# Altium PCB PCB2.PcbDoc (part 2 of 2)
Units mil, origin at the board's own origin, x right, y up, seen from the top; angles counter-clockwise.
Board outline 3629.25 x 3621.67 mil, 2 copper layers (Top Layer, Bottom Layer); 84 components, 57 nets, 320 pads, 58 vias.
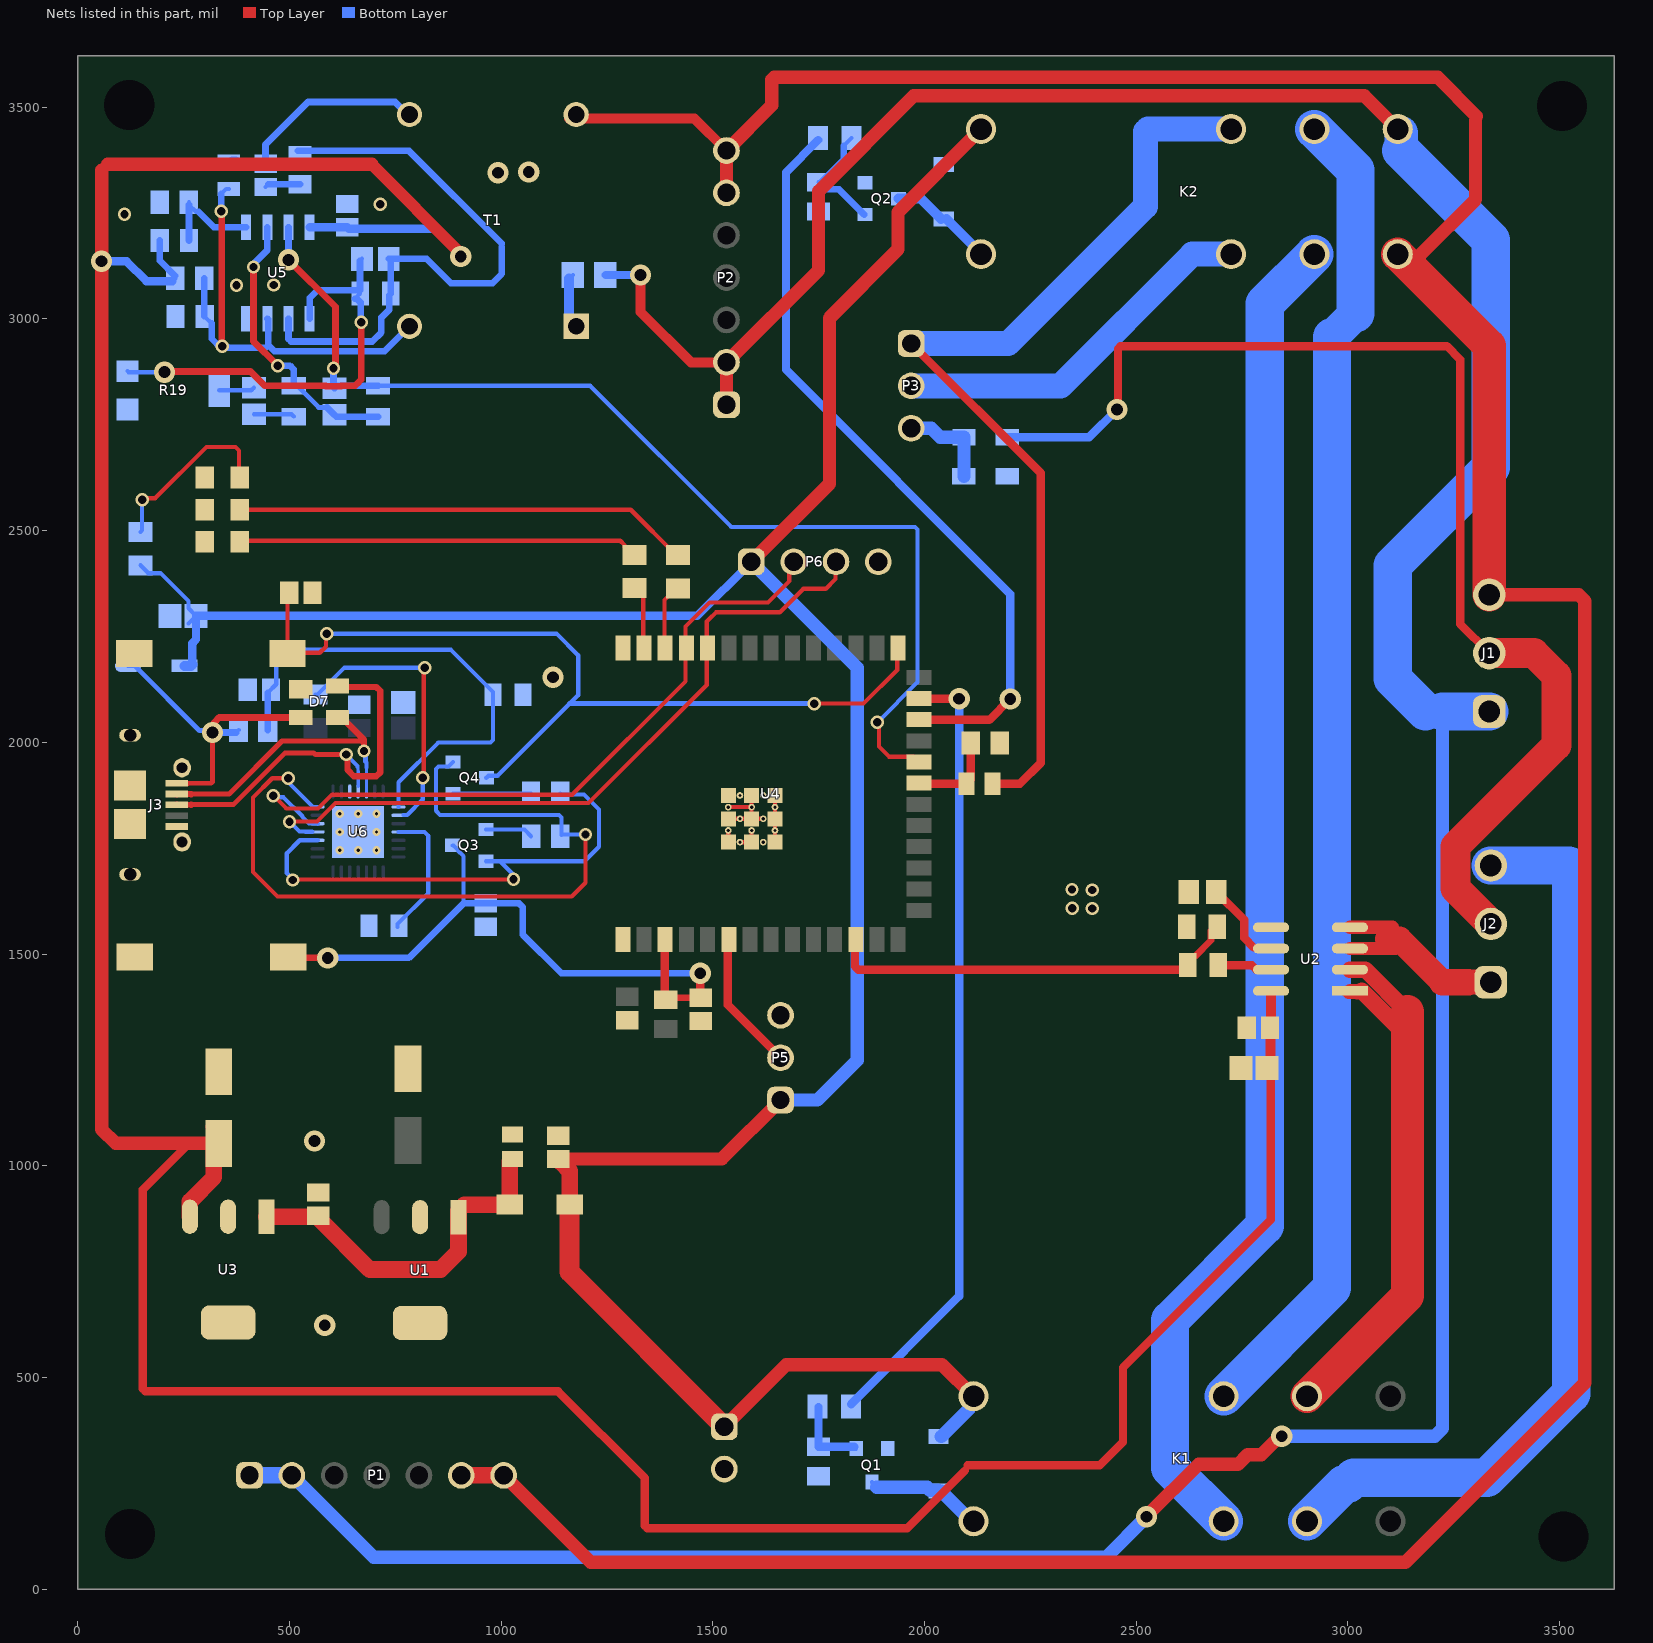
[diagram p2: the nets of this part, all layers, seen from the top]

## Via types
v1: diameter 31.5, hole 19.68, Top Layer to Bottom Layer, 28 vias
v2: diameter 50, hole 28, Top Layer to Bottom Layer, 21 vias
v3: diameter 19.68, hole 7.87, Top Layer to Bottom Layer, 9 vias

## Nets (pads, with @x,y where several pads share a name; then routed paths per layer and width w, separated by ;. In a path a pad name is that pad's centre, name@x,y a point inside that pad or via, vN(x,y) a via of type N, cw(c..) or ccw(c..) an arc to the next point about the centre after c; other vN are vias at no path point) (continued)
+3V3B: C1.1 C2.2 C8.2 C13.1 R15.2 R23.2 U2.8 U3.3 U5.8 | length 8912.1
  Top Layer w10: 154.26,473.14 160.12,467.28 ; C8.2@333.5,1052.81 333.5,1079.19 C8.2@340.53,1086.23 ; 1134.87,467.28 1134.96,467.38 ; 1339.7,150.18 1345.55,144.32 ; 2095.78,280.46 2095.78,287.16 2101.63,293.02 ; C2.2@2812.63,1318.2 C2.2@2817.4,1313.44
  Top Layer w19.68: 154.26,473.14 154.26,943.98 261.93,1051.64 ; 160.12,467.28 1134.87,467.28 ; 1134.96,467.38 1339.7,262.64 1339.7,150.18 ; 1345.55,144.32 1959.64,144.32 2095.78,280.46 ; 2101.63,293.02 2414.13,293.02 2468.58,347.48 2468.58,523.67 2817.4,872.49 C1.1@2817.4,1222.62
  Top Layer w23.62: 57.23,3350.8 71.07,3364.64 ; v2(905.07,3146.98) v2@905.07,3153.94 ; C2.2@2815.67,1325.72 C2.2@2820.37,1330.42 ; C1.1@2817.4,1222.62 C2.2@2817.4,1313.44 ; C2.2@2818.33,1329.82 U2.8@2818.33,1412.96
  Top Layer w27.56: 694.37,3364.64 v2@905.07,3153.94
  Top Layer w31.5: 57.23,3350.8 57.23,3136.66 v2(56.38,3135.81) 57.23,3134.96 57.23,1329.09 57.23,1085.51 89.93,1052.81 C8.2@333.5,1052.81 333.5,1076.44 C8.2@317.75,1092.18 ; 71.07,3364.64 694.37,3364.64
  Top Layer w39.37: U3.3@265.17,879.76 265.17,916.04 322.03,972.9 322.03,1041.34 C8.2@333.5,1052.81
  Bottom Layer w10: R15.2@224.21,3089.03 R15.2@230.53,3095.35 R15.2@230.53,3101.25 ; C13.1@636.83,3216.23 C13.1@637.01,3216.06 C13.1@640.55,3212.51
  Bottom Layer w15.75: R23.2@194.24,3184.9 194.24,3137.55 R15.2@230.53,3101.25
  Bottom Layer w19.68: v2(56.38,3135.81) 115.88,3135.81 162.66,3089.03 R15.2@224.21,3089.03 ; U5.8@548.22,3216.23 C13.1@636.83,3216.23 ; C13.1@640.55,3212.51 846.5,3212.51 905.07,3153.94 v2(905.07,3146.98)
+5V: C3.2 C17.1 D1.1 D2.1 D6.1 FB2.1 K1.8 K2.8 P4.1 P5.1 P6.1 R18.1 | length 6771.8
  Top Layer w10: C3.2@1137.44,1007.39 C3.2@1142.36,1007.39
  Top Layer w31.5: C3.2@1135.25,1016.12 1521.13,1016.12 P5.1@1660.14,1155.13 ; P4.1@1527.43,383.9 1673.82,530.29 2041.39,530.29 K1.8@2115.86,455.82 ; P6.1@1591.01,2426.17 1775.6,2610.76 1775.6,3001.91 1937.42,3163.73 1937.42,3251.95 K2.8@2133.3,3447.83
  Top Layer w39.37: C3.2@1142.36,1007.39 1162.05,987.7 FB2.1@1162.05,908.06
  Top Layer w47.24: FB2.1@1162.05,908.06 1162.05,749.28 P4.1@1527.43,383.9
  Bottom Layer w10: R18.1@148.5,2417.97 167.12,2399.35 195.85,2399.35 261.89,2333.31 261.89,2316.46 C17.1@279.92,2298.43 C17.1@261.89,2280.39 ; D1.1@2033.18,360.55 D1.1@2039.29,360.55 ; D2.1@2045.62,3364.57 D2.1@2051.73,3364.57 ; K1.8@2104.19,425.46 2104.19,444.15 K1.8@2115.86,455.82 ; K2.8@2133.3,3446.14 K2.8@2133.3,3447.83
  Bottom Layer w19.68: D6.1@271.05,2183.17 271.05,2233.84 279.92,2242.71 C17.1@279.92,2298.43 1463.26,2298.43 P6.1@1591.01,2426.17
  Bottom Layer w23.62: D6.1@253.01,2180.36 268.24,2180.36 D6.1@271.05,2183.17 ; D2.1@2051.73,3364.57 K2.8@2133.3,3446.14
  Bottom Layer w31.5: P6.1@1591.01,2426.17 1841.16,2176.02 1841.16,1249.23 1747.07,1155.13 P5.1@1660.14,1155.13 ; D1.1@2039.29,360.55 K1.8@2104.19,425.46
+5V_B: C4.1 C7.2 FB2.2 U1.1 U3.1 | length 857
  Top Layer w10: C7.2@560.95,888.88 C7.2@568.17,881.66 C7.2@573.09,881.66 ; U1.1@899.42,894.12 U1.1@913.36,908.06 ; C4.1@1020.32,1010.05 C4.1@1026.77,1016.5
  Top Layer w39.37: U3.1@446.27,879.76 C7.2@560.33,879.76 ; C7.2@572.47,872.54 689.87,755.14 857.46,755.14 899.42,797.1 U1.1@899.42,894.12 ; U1.1@913.36,908.06 FB2.2@1020.32,908.06 C4.1@1020.32,1010.05
"AC IN Negative": J1.3 K2.4 P1.6 P1.7 P2.6 P2.7 T1.2 | length 8739.1
  Top Layer w10: 1639.24,3564.2 1645.1,3570.05 ; K2.4@3117.55,3152.56 3172.2,3152.56 ; 3301.17,3468.24 3303.21,3470.28 3303.21,3478.57
  Top Layer w23.62: T1.2@1160.85,3473.16 1456.51,3473.16 P2.7@1532.37,3397.3
  Top Layer w31.5: P1.7@1006.2,268.87 1211.57,63.51 3135.78,63.51 3559.38,487.12 3559.38,2333.75 3544.83,2348.3 J1.3@3333.73,2348.3 ; P2.6@1532.37,3297.3 P2.7@1532.37,3397.3 1639.24,3504.17 1639.24,3564.2 ; 1645.1,3570.05 3211.72,3570.05 3303.21,3478.57 ; 3172.2,3152.56 3301.17,3281.52 3301.17,3468.24
  Top Layer w39.37: P1.6@906.2,268.87 P1.7@1006.2,268.87
  Top Layer w78.74: K2.4@3117.55,3152.56 3333.73,2936.38 J1.3@3333.73,2348.3
"AC IN Positive": J1.1 K2.5 P1.1 P1.2 P2.1 P2.2 R12.1 | length 8999.5
  Top Layer w23.62: v2@1329.44,3100.24 1329.44,3016.36 1448.49,2897.3 P2.2@1532.37,2897.3
  Top Layer w31.5: P2.1@1532.37,2797.3 P2.2@1532.37,2897.3 1749.87,3114.8 1749.87,3301.57 1974.82,3526.51 3038.87,3526.51 K2.5@3117.55,3447.83 ; v2@2523.94,171.97 2647.57,295.6 2740.37,295.6 2762.66,317.9 2795.34,317.9 2838.72,361.28 v2(2843.72,361.28)
  Bottom Layer w10: R12.1@1246.69,3103.66 R12.1@1247.09,3103.27 ; v2@1329.44,3100.24 v2(1329.44,3103.27) ; P2.1@1512.51,2817.16 P2.1@1532.37,2797.3 ; K2.5@3117.55,3447.83 K2.5@3125.7,3439.68
  Bottom Layer w19.68: R12.1@1247.09,3103.27 v2(1329.44,3103.27)
  Bottom Layer w31.5: P1.2@506.2,268.87 699.22,75.85 2429.24,75.85 2523.94,170.56 v2(2523.94,171.29) v2@2523.94,171.97 ; v2(2843.72,361.28) 3204.82,361.28 3223.27,379.73 3223.27,2072.7
  Bottom Layer w39.37: P1.1@406.2,268.87 P1.2@506.2,268.87
  Bottom Layer w78.74: 3125.7,3397.33 K2.5@3125.7,3439.68 ; 3183.11,2072.7 3223.27,2072.7
  Bottom Layer w90.55: 3125.7,3397.33 3337.08,3185.95 3337.08,2649.11 3105.35,2417.38 3105.35,2150.46 3183.11,2072.7 ; 3223.27,2072.7 J1.1@3333.73,2072.7
AC_GND: FB3.1 J1.2 J2.2 | length 2861.6
  Top Layer w10: 2456.75,2929.57 2462.61,2935.43
  Top Layer w19.68: v2@2456.75,2799.67 2456.75,2929.57 ; 2462.61,2935.43 3233.28,2935.43 3264.83,2903.88 3264.83,2279.41 J1.2@3333.73,2210.5
  Top Layer w70.87: J1.2@3333.73,2210.5 3439.31,2210.5 3492.15,2157.66 3492.15,1992.54 3253.64,1754.02 3253.64,1655 J2.2@3337.46,1571.18
  Bottom Layer w19.68: FB3.1@2195.49,2720.46 2388.99,2720.46 v2(2454.3,2785.77)
CHIP_EN: C10.2 C20.1 Q3.3 R9.2 SW1.2 U4.3 | length 1572.2
  Top Layer w10: SW1.2@497.27,1493.11 SW1.2@499.48,1490.89 ; U4.3@1385.74,1533.47 U4.3@1386.59,1532.62 ; R9.2@1388.68,1391.87 R9.2@1394.88,1398.07
  Top Layer w15.75: SW1.2@499.48,1490.89 v2(590.99,1490.89) ; R9.2@1392.8,1396.93 C10.2@1471.08,1396.93
  Top Layer w19.68: R9.2@1386.59,1390.72 U4.3@1386.59,1532.62 ; v2(1470.36,1454.55) 1470.72,1454.19 1470.72,1397.29 C10.2@1471.08,1396.93
  Bottom Layer w10: Q3.3@885.77,1756.54 887.74,1756.54 898.49,1745.79 898.49,1743.82 911.21,1731.1 911.21,1619.63
  Bottom Layer w15.75: v2(590.99,1490.89) 782.48,1490.89 911.21,1619.63 938.09,1619.63 959.32,1619.63 C20.1@965.84,1619.63 ; C20.1@964.24,1619.63 1042.46,1619.63 1051.69,1610.41 1051.69,1545.29 1142.43,1454.55 v2(1470.36,1454.55)
CUTOFF_POSITIVE: K1.6 U2.1 U2.2 | length 1402.5
  Top Layer w31.5: U2.1@3032.77,1412.96 U2.1@3004.63,1412.96 3001.43,1409.76 U2.1@3035.5,1407.05
  Top Layer w39.37: U2.2@3004.63,1462.96 3041.05,1462.96 3140.65,1363.35 ; U2.1@3032.77,1412.96 3140.65,1305.07
  Top Layer w78.74: K1.6@2903.26,455.82 3140.65,693.21 3140.65,1305.07 3140.65,1363.35
CUTOFF_RELAY: R5.1 U4.25 | length 1876.7
  Top Layer w10: U4.25@1984.95,2102.96 U4.25@1986.14,2101.77 ; v2(2081.85,2102.96) v2@2082.85,2103.97
  Top Layer w19.68: U4.25@1984.95,2102.96 v2(2081.85,2102.96)
  Bottom Layer w10: R5.1@1826.64,431.94 R5.1@1826.64,436.87
  Bottom Layer w19.68: R5.1@1826.64,436.87 2081.85,692.08 v2(2081.85,2102.96)
DTR: Q4.2 R24.2 U6.28 | length 1862.9
  Top Layer w10: v1(497.64,1914.95) 459.83,1914.95 414.37,1869.49 414.37,1693.74 471.96,1636.14 1167.02,1636.14 1199.32,1668.44 v1(1199.32,1782.09)
  Bottom Layer w10: v1(497.64,1914.95) 501.76,1910.84 501.76,1901.87 556.36,1847.27 U6.28@567.02,1847.27 ; Q4.2@886.42,1953.39 875.67,1942.64 852.4,1942.64 846.54,1936.78 846.54,1838.17 856.19,1828.52 1136.97,1828.52 1142.82,1822.67 1142.82,1781.13 1143.78,1782.09 v1(1199.32,1782.09)
GND: C1.2 C2.1 C3.1 C4.2 C5.1 C6.2 C7.1 C8.1 C10.1 C12.1 C13.2 C16.2 C17.2 C18.2 C19.2 C20.2 C21.1 D3.1 D4.1 D5.1 D7.1 FB1.1 J3.5 J3.Shell P4.2 P5.3 P6.4 Q1.2 Q2.2 R3.2 R4.1 R7.1 R8.1 R19.3 R20.2 R22.2 R26.2 R29.1 SW1.1 SW2.1 U1.2 U1.4 U2.5 U3.2 U3.4 U4.1 U4.40 U4.41_1 U4.41_2 U4.41_3 U4.41_4 U4.41_5 U4.41_6 U4.41_7 U4.41_8 U4.41_9 U4.41_10 U4.41_11 U4.41_12 U4.41_13 U4.41_14 U4.41_15 U4.41_16 U4.41_17 U4.41_18 U4.41_19 U4.41_20 U4.41_21 U5.4 U6.3 U6.29 | length 385.8
  Top Layer w10: U4.41_1@1536.6,1764.2 U4.41_10@1536.6,1791.76 ; U4.41_2@1536.6,1819.32 U4.41_13@1564.16,1819.32 U4.41_5@1591.72,1819.32 ; U4.41_11@1536.6,1846.88 U4.41_16@1591.72,1846.88 ; U4.41_12@1564.16,1764.2 U4.41_4@1591.72,1764.2 U4.41_15@1591.72,1791.76 ; U4.41_6@1591.72,1874.43 U4.41_16@1591.72,1846.88 ; U4.41_18@1619.28,1819.32 U4.41_5@1591.72,1819.32 ; U4.41_7@1646.84,1764.2 U4.41_20@1646.84,1791.76 U4.41_8@1646.84,1819.32 U4.41_21@1646.84,1846.88 U4.41_9@1646.84,1874.43 ; U4.41_5@1591.72,1819.32 U4.41_16@1591.72,1846.88
  other v1: 2348.94,1607.76 2396.39,1607.52 2396.39,1651.03 2348.44,1652.26 375.5,3079.07 463.44,3079.69 111.11,3246.8 715.16,3270.28
  other v2: 583.65,623.42 559.57,1058.57 1122.97,2153.54 993.01,3344.76 1065.55,3346.49
  other v3: 619.19,1744.91 662.5,1744.91 705.8,1744.91 619.19,1788.21 662.5,1788.21 705.8,1788.21 619.19,1831.52 662.5,1831.52 705.8,1831.52
GPIO_0: C18.1 Q4.3 SW2.2 U4.27 | length 2126.4
  Top Layer w10: C18.1@497.07,2341.79 495.71,2340.44 SW2.2@495.71,2209.74 497.28,2211.3 572.11,2211.3 586.54,2225.74 586.54,2254.31 v1(588.72,2256.49) ; v1(1739.87,2091.28) 1856.05,2091.28 1935.74,2170.97 U4.27@1935.74,2222.45
  Bottom Layer w10: v1(588.72,2256.49) 1131.12,2256.49 1182.16,2205.45 1182.16,2111.23 1162.21,2091.28 992.01,1921.08 970.25,1921.08 Q4.3@965.16,1915.99
  Bottom Layer w11.81: 1162.21,2091.28 v1(1739.87,2091.28)
GPIO_6_HAll_SENS: P5.2 U4.6 | length 329.9
  Top Layer w19.68: U4.6@1535.74,1533.47 1535.74,1379.53 P5.2@1660.14,1255.13
GPIO_8_CURRENT_SENS: R2.2 R4.2 U4.12 | length 985.2
  Top Layer w10: R2.2@2610.48,1463.17 R2.2@2621.06,1473.74 ; R4.2@2675.93,1548.59 R4.2@2691.59,1564.26
  Top Layer w15.75: R2.2@2621.06,1473.74 2621.06,1481.62 2633.85,1494.41 2638.53,1494.41 2676.69,1532.58 R4.2@2676.69,1555.33
  Top Layer w19.68: U4.12@1835.74,1533.47 1835.74,1470.58 1843.16,1463.17 R2.2@2610.48,1463.17
GPIO_13_DC_VOLTAGE: R1.2 R3.1 U4.21 | length 213.1
  Top Layer w10: U4.21@1984.95,1902.96 U4.21@1985.54,1902.37 ; R1.2@2099.18,1902.37 R1.2@2108.96,1912.16
  Top Layer w19.68: U4.21@1985.54,1902.37 R1.2@2099.18,1902.37 ; R1.2@2108.96,1912.16 R3.1@2108.96,1996.97
GPIO_14_AC_VOLTAGE: C11.2 R11.2 U4.22 U5.7 | length 2594.3
  Top Layer w10: v1(1888.61,2047.03) 1892.72,2042.92 1892.72,1989.77 1916.4,1966.09 1974.28,1966.09 U4.22@1986.99,1953.37
  Top Layer w15.75: v2(498.41,3139.24) 609.32,3028.34 609.32,2888.47 v1(604.34,2883.49)
  Bottom Layer w10: v2@498.22,3151.71 v2@500.3,3149.63 ; R11.2@709.84,2841.72 1210.59,2841.72 1543.92,2508.39 1977.74,2508.39 1983.59,2502.53 1983.59,2142.01 v1(1888.61,2047.03)
  Bottom Layer w15.75: v2@498.22,3151.71 U5.7@498.22,3216.23 ; v1(604.34,2883.49) 604.34,2844.36 606.98,2841.72 C11.2@606.98,2836.1 ; C11.2@612.61,2841.72 R11.2@709.84,2841.72
NetC6_1: C6.1 U2.6 | length 213.9
  Top Layer w10: C6.1@2688.94,1642.85 C6.1@2688.94,1646.78 ; U2.6@2777.4,1515.43 2815.85,1515.43 U2.6@2818.33,1512.96
  Top Layer w19.68: C6.1@2688.94,1646.78 2755.13,1580.59 2755.13,1537.7 U2.6@2777.4,1515.43
NetC9_1: C9.1 R10.1 R13.2 U5.2 | length 1407.8
  Bottom Layer w10: 498.33,2952.33 498.33,2952.11 504.08,2946.36 ; C9.1@734.56,3141.55 C9.1@739.86,3136.24 ; R10.1@736.36,3055.88 R10.1@739.86,3059.38 ; 1001.8,3169.44 1001.8,3177.72
  Bottom Layer w15.75: U5.2@498.22,3000.48 498.22,2952.44 498.33,2952.33 ; 504.08,2946.36 695.93,2946.36 717.53,2967.96 717.53,3002.86 736.36,3021.69 R10.1@736.36,3055.88 ; R13.2@520.41,3396.61 782.91,3396.61 1001.8,3177.72 ; C9.1@734.56,3141.55 824.59,3141.55 882.04,3084.09 979.78,3084.09 1001.8,3106.11 1001.8,3169.44 ; R10.1@739.86,3059.38 C9.1@739.86,3136.24
NetC9_2: C9.2 R10.2 R19.1 U5.1 | length 1050.9
  Top Layer w10: 655.36,2841.72 661.22,2847.58
  Top Layer w15.75: v2(205.66,2873.98) 207.33,2875.64 408.6,2875.64 442.52,2841.72 585.48,2841.72 586.58,2840.62 622.1,2840.62 623.2,2841.72 655.36,2841.72 ; 661.22,2847.58 669.78,2856.14 v1(669.78,2991.68)
  Bottom Layer w10: R19.1@118.12,2876.42 120.56,2873.98 v2(205.66,2873.98) ; R10.2@654.76,3047.11 R10.2@667.03,3059.38 R10.2@667.03,3067.25 ; C9.2@667.03,3137.01 C9.2@671.56,3141.55
  Bottom Layer w15.75: U5.1@548.22,3000.48 548.22,3049.15 566.32,3067.25 667.03,3067.25 C9.2@667.03,3137.01 ; R10.2@654.76,3047.11 660,3047.11 668.4,3038.71 668.4,2993.06 v1(669.78,2991.68)
NetC11_1: C11.1 R11.1 R21.2 U5.6 | length 659.6
  Top Layer w15.75: v1(415.46,3122.34) 415.46,2946.74 v1(472.89,2889.31)
  Bottom Layer w10: R21.2@510.61,2841.9 R21.2@518.49,2841.9 ; C11.1@606.98,2773.1 C11.1@611.2,2768.89
  Bottom Layer w11.81: R21.2@518.49,2841.9 569.57,2790.82 C11.1@589.27,2790.82
  Bottom Layer w15.75: v1@419.96,3134.34 448.22,3162.6 U5.6@448.22,3216.23 ; v1(472.89,2889.31) 501.39,2889.31 510.61,2880.09 R21.2@510.61,2841.9 ; C11.1@589.27,2790.82 C11.1@606.98,2773.1 ; C11.1@611.2,2768.89 R11.1@709.84,2768.89
NetC14_1: C14.1 R14.2 T1.3 | length 547.5
  Bottom Layer w10: R14.2@374.68,3378.3 364.27,3378.3 R14.2@357.5,3371.53 362.8,3366.23 C14.1@444.01,3366.23 ; T1.3@779.5,3482.28 T1.3@783.8,3482.28
  Bottom Layer w15.75: C14.1@444.01,3366.23 444.01,3411.5 544.23,3511.73 750.05,3511.73 T1.3@779.5,3482.28
NetC14_2: C14.2 R13.1 | length 84
  Bottom Layer w10: C14.2@444.01,3311.12 C14.2@450.9,3318
  Bottom Layer w15.75: C14.2@450.9,3318 R13.1@525.17,3318
NetC15_1: C15.1 R19.2 | length 84.4
  Bottom Layer w10: R19.2@334.65,2831.15 410.17,2831.15 C15.1@416.47,2837.45
NetC15_2: C15.2 R21.1 | length 96.4
  Bottom Layer w10: C15.2@416.47,2774.45 505.23,2774.45 R21.1@510.61,2769.07
NetC16_1: C16.1 R25.1 R26.1 U6.8 | length 1174.3
  Bottom Layer w10: C16.1@449.38,2117.23 469.27,2137.12 469.27,2197.75 489.8,2218.28 881.62,2218.28 980.87,2119.03 R26.1@980.87,2112.14 980.87,2005.47 975.01,1999.61 851.97,1999.61 757.97,1905.6 U6.8@757.97,1847.27
  Bottom Layer w15.75: R25.1@449.38,2029.07 C16.1@449.38,2117.23
NetD1_2: D1.2 K1.1 Q1.3 | length 279.5
  Bottom Layer w10: Q1.3@1875.92,253.23 1875.92,251.26 1886.67,240.51 Q1.3@1887.27,240.51 ; D1.2@2033.18,231.81 D1.2@2039.29,231.81 ; K1.1@2110.55,160.55 K1.1@2115.86,160.55
  Bottom Layer w31.5: Q1.3@1887.27,240.51 2006.47,240.51 2013,233.98 2031.02,233.98 D1.2@2033.18,231.81 ; D1.2@2039.29,231.81 K1.1@2110.55,160.55
NetD2_2: D2.2 K2.1 Q2.3 | length 250.5
  Bottom Layer w10: D2.2@2039.52,3235.83 D2.2@2045.62,3235.83 D2.2@2051.73,3235.83 ; K2.1@2133.3,3152.56 K2.1@2133.3,3154.25
  Bottom Layer w23.62: Q2.3@1938.06,3283.64 1991.71,3283.64 D2.2@2039.52,3235.83 ; D2.2@2051.73,3235.83 K2.1@2133.3,3154.25
NetD3_2: D3.2 R16.2 | length 949.9
  Top Layer w10: D3.2@382.85,2473.66 385.19,2476 1281.52,2476 1291.47,2466.05 1291.47,2461.13 1310.09,2442.5 R16.2@1315.01,2442.5
NetD4_2: D4.2 R17.2 | length 1078.8
  Top Layer w10: D4.2@383.44,2549.16 1306.42,2549.16 1413.14,2442.44 R17.2@1418.07,2442.44
NetD5_2: D5.2 R18.2 | length 425.7
  Top Layer w10: v1(152.54,2572.34) 156.43,2576.23 183.29,2576.23 304.29,2697.24 372.78,2697.24 381.37,2688.66 381.37,2627.32 D5.2@383.44,2625.25
  Bottom Layer w10: R18.2@148.5,2496.71 152.54,2500.75 v1(152.54,2572.34)
NetQ1_1: Q1.1 R5.2 R7.2 | length 187.1
  Bottom Layer w10: R5.2@1747.9,431.94 R5.2@1749.63,430.22 ; Q1.1@1834.34,336.15 Q1.1@1838.52,331.97
  Bottom Layer w19.68: R5.2@1749.63,430.22 R7.2@1749.63,336.15 Q1.1@1834.34,336.15
NetQ2_1: Q2.1 R6.2 R8.2 | length 281.4
  Bottom Layer w10: R8.2@1755.78,3322.19 R8.2@1749.87,3322.19 R8.2@1766.52,3305.53 ; R6.2@1809.13,3408.34 R6.2@1827.75,3426.97 ; Q2.1@1857.35,3246.23 Q2.1@1859.32,3246.23
  Bottom Layer w15.75: R8.2@1755.78,3322.19 1809.13,3375.54 R6.2@1809.13,3408.34 ; R8.2@1766.52,3305.53 1798.05,3305.53 Q2.1@1857.35,3246.23
NetQ3_1: Q3.1 R24.1 | length 113.1
  Bottom Layer w10: Q3.1@964.51,1793.94 1055.41,1793.94 R24.1@1071.07,1778.28
NetQ4_1: Q4.1 R27.1 | length 184.8
  Bottom Layer w10: Q4.1@886.42,1878.58 1070.12,1878.58 R27.1@1070.88,1879.34
NetR2_1: R2.1 U2.7 | length 140.1
  Top Layer w10: U2.7@2783.49,1462.96 U2.7@2818.33,1462.96
  Top Layer w19.68: R2.1@2700.78,1475.06 2692.01,1475.06 2693.89,1473.18 2773.27,1473.18 U2.7@2783.49,1462.96
NetR12_2: R12.2 T1.1 | length 134.3
  Bottom Layer w10: R12.2@1160.85,3094.59 R12.2@1169.92,3103.66
  Bottom Layer w23.62: T1.1@1160.85,2973.16 R12.2@1160.85,3094.59
NetR14_1: R14.1 R15.1 R20.1 T1.4 U5.3 | length 1105.5
  Top Layer w10: v1(339.18,3253.84) v1@340.29,3252.73 ; v1@340.29,2936.56 v1(341.4,2935.45)
  Top Layer w15.75: v1@340.29,2936.56 v1@340.29,3252.73
  Bottom Layer w10: R20.1@299.43,3006.3 R20.1@300.25,3005.49 R20.1@316.9,2988.83 ; R14.1@339.18,3294.84 350.92,3306.57 R14.1@357.5,3306.57 ; 444.59,2931.92 450.45,2937.78
  Bottom Layer w15.75: R20.1@299.43,3006.3 R15.1@299.43,3095.35 ; R20.1@316.9,2988.83 316.9,2952.9 337.88,2931.92 338.39,2932.44 355.55,2932.44 356.07,2931.92 444.59,2931.92 ; v1(339.18,3253.84) R14.1@339.18,3294.84 ; U5.3@448.22,3000.48 450.45,2998.25 450.45,2937.78 464.74,2923.49 725.01,2923.49 T1.4@783.8,2982.28
NetR22_1: R22.1 R23.1 U5.5 | length 247.4
  Bottom Layer w10: R22.1@262.94,3275.22 263.14,3275.02 263.14,3269.11 279.6,3252.66 285.5,3252.66
  Bottom Layer w15.75: R23.1@263.14,3184.9 R22.1@263.14,3269.11 ; 285.5,3252.66 321.93,3216.23 U5.5@398.22,3216.23
NetR28_1: R28.1 U6.9 | length 657.9
  Top Layer w10: v1(814.95,1915.96) 817.4,1918.41 817.4,2173.73 v1(819.85,2176.18)
  Bottom Layer w10: R28.1@562.02,2112.87 566.94,2112.87 630.24,2176.18 v1(819.85,2176.18) ; U6.9@769.7,1828.33 778.61,1828.33 814.95,1864.68 v1(814.95,1915.96)
NetR29_2: R29.2 U6.11 | length 319.5
  Bottom Layer w10: R29.2@755.75,1563.86 755.75,1570.75 828.4,1643.39 828.4,1779.09 819.28,1788.21 U6.11@757.97,1788.21
"OUT Negative": J2.3 K1.3 | length 2173.2
  Bottom Layer w78.74: 2999.22,248.7 3013.71,263.2
  Bottom Layer w90.55: K1.3@2903.26,160.55 2991.42,248.7 2999.22,248.7 ; 3013.71,263.2 3328.22,263.2 3526.83,461.81 3526.83,1703.11 ; J2.3@3337.46,1708.97 3520.97,1708.97
"OUT Positive": J2.1 U2.3 U2.4 | length 494
  Top Layer w31.5: U2.3@3004.63,1512.96 3112.23,1512.96 ; U2.4@3004.63,1562.96 3104.71,1562.96
  Top Layer w59.06: 3093.39,1535.4 3121.21,1535.4 3223.23,1433.38 ; 3284.08,1433.38 J2.1@3337.46,1433.38
  Top Layer w62.99: 3223.23,1433.38 3284.08,1433.38
QC_AC_RELAY: R6.1 U4.24 | length 1813.4
  Top Layer w19.68: U4.24@1984.95,2052.96 2152.94,2052.96 v2(2202.4,2102.42)
  Bottom Layer w10: R6.1@1749.01,3422.04 R6.1@1749.01,3426.97
  Bottom Layer w19.68: R6.1@1749.01,3422.04 1672.84,3345.88 1672.84,2879.88 2202.4,2350.33 v2(2202.4,2102.42)
QC_DC_NEGATIVE: FB1.2 FB3.2 P3.3 | length 226
  Bottom Layer w10: FB1.2@2093.07,2627.88 FB1.2@2093.07,2627.88
  Bottom Layer w31.5: P3.3@1968.49,2741.67 2016.1,2741.67 2037.3,2720.46 FB3.2@2093.13,2720.46 FB1.2@2093.07,2627.88
QC_DC_POSITIVE: K2.7 P3.1 R1.1 | length 2320.1
  Top Layer w19.68: P3.1@1968.49,2941.67 2274.47,2635.69 2274.47,1951.26 2225.58,1902.37 R1.1@2160.2,1902.37
  Bottom Layer w10: 2521.44,3441.98 2527.3,3447.83
  Bottom Layer w59.06: P3.1@1968.49,2941.67 2197.62,2941.67 2521.44,3265.48 2521.44,3441.98 ; 2527.3,3447.83 K2.7@2723.85,3447.83
QC_SERIAL: K2.2 P3.2 | length 884.1
  Bottom Layer w59.06: P3.2@1968.49,2841.67 2321.34,2841.67 2632.23,3152.56 K2.2@2723.85,3152.56
RELAY_NEGATIVE: K1.2 K2.3 | length 3185.7
  Bottom Layer w90.55: K1.2@2706.41,160.55 2579.76,287.2 2579.76,634.85 2803.61,858.7 2803.61,3035.46 K2.3@2920.7,3152.56
RELAY_POSITIVE: K1.7 K2.6 | length 3161.1
  Bottom Layer w78.74: 2962.28,2956.96 3017.71,3012.39
  Bottom Layer w90.55: K1.7@2706.41,455.82 2962.28,711.69 2962.28,2956.96 ; K2.6@2920.7,3447.83 3017.71,3350.83 3017.71,3012.39
RTS: Q3.2 R27.2 U6.24 | length 1197.5
  Top Layer w10: v1(508.26,1674.7) 509.34,1675.78 1028.35,1675.78 v1(1029.43,1676.86)
  Bottom Layer w10: v1(508.26,1674.7) 508.26,1677.04 494,1691.31 494,1737.73 524.8,1768.53 U6.24@567.02,1768.53 ; Q3.2@964.51,1719.14 997.21,1719.14 ; v1@1028.95,1687.39 997.21,1719.14 ; R27.2@1139.78,1879.34 1142.63,1876.49 1195.93,1876.49 1231.15,1841.26 1231.15,1753.37 1196.92,1719.14 997.21,1719.14
RXD0: P6.3 U4.36 U6.25 | length 1719.3
  Top Layer w10: v1(500.48,1812.71) 565.24,1812.71 608.9,1856.36 1206.57,1856.36 1485.74,2135.53 1485.74,2222.86 1485.74,2285.05 1491.6,2290.91 1507.5,2306.81 1658.28,2306.81 1713.81,2362.35 1766.73,2362.35 1789.91,2385.53 1789.91,2425.08 P6.3@1791.01,2426.17
  Bottom Layer w10: v1(500.48,1812.71) 523.93,1789.26 537.49,1789.26 538.22,1788.53 U6.25@554.34,1788.53
STATUS_LED: R16.1 U4.39 | length 151.1
  Top Layer w10: R16.1@1315.01,2363.76 1317.12,2363.76 1335.74,2345.14 U4.39@1335.74,2222.45
TXD0: P6.2 U4.37 U6.26 | length 1711.8
  Top Layer w10: v1(462.47,1874.11) 493.12,1843.45 567.7,1843.45 600.61,1876.36 1168.15,1876.36 1435.74,2143.96 U4.37@1435.74,2222.45 ; U4.37@1435.94,2222.65 1435.94,2273.6 1492.66,2330.32 1630.53,2330.32 1680.87,2380.66 1680.87,2416.03 P6.2@1691.01,2426.17
  Bottom Layer w10: v1(462.47,1874.11) 466.58,1869.99 486.68,1869.99 531.23,1825.44 531.23,1823.8 546.39,1808.65 566.28,1808.65 U6.26@567.02,1807.9
USB_D_N: D7.3 J3.2 U6.5 | length 700.8
  Top Layer w11.81: 268.25,1877.58 357.54,1877.58 482.8,2002.84 670.33,2002.84 673.16,2000.01
  Top Layer w13.78: J3.2@234.56,1877.66 268.17,1877.66
  Top Layer w15: J3.2@234.35,1877.87 J3.2@234.56,1877.66 ; 268.17,1877.66 268.25,1877.58 ; D7.3@613.87,2058.4 623.71,2058.4 676.44,2005.67 676.44,1979.36 v1(676.39,1979.31)
  Bottom Layer w7.87: U6.5@682.18,1883.69 682.18,1940.76
  Bottom Layer w9.84: 680.16,1954.89 682.18,1952.87 682.18,1940.76
  Bottom Layer w11.81: v1(676.39,1979.31) 680.16,1975.54 680.16,1954.89
USB_D_P: D7.4 J3.3 U6.4 | length 961.8
  Top Layer w11.81: 268.25,1852.58 367.89,1852.58 490.32,1975.01 557.79,1975.01 561.62,1971.18 v1(634.41,1971.18)
  Top Layer w13.78: J3.3@234.56,1852.5 268.17,1852.5
  Top Layer w15: J3.3@234.35,1852.28 J3.3@234.56,1852.5 ; 268.17,1852.5 268.25,1852.58 ; D7.4@613.87,2133.2 616.65,2130.42 705.78,2130.42 714.56,2121.63 714.56,1928.69 705.78,1919.91 652.5,1919.91 637.57,1934.84 637.57,1968.03 v1(634.41,1971.18)
  Bottom Layer w7.87: 661.35,1941.75 662.34,1940.76 662.34,1932.54 662.57,1932.31 662.57,1896.56 U6.4@662.5,1896.48
  Bottom Layer w9.84: v1(634.41,1971.18) 661.35,1944.24 661.35,1941.75
VBUS: D6.2 D7.2 J3.1 R25.2 | length 759.7
  Top Layer w10: J3.1@234.35,1903.46 235.57,1902.24 261.72,1902.24 262.94,1903.46 315.06,1903.46
  Top Layer w11.81: 315.06,1903.46 318.36,1906.76 v2(318.42,2022.74)
  Top Layer w15.75: v2@323.06,2027.38 323.06,2047.08 334.38,2058.4 D7.2@527.26,2058.4
  Bottom Layer w10: D6.2@119.12,2180.36 D6.2@135.17,2180.36 ; v2@314.89,2027.33 v2@318.95,2023.27 ; R25.2@374.68,2023.27 R25.2@380.48,2029.07
  Bottom Layer w11.81: D6.2@135.17,2180.36 288.2,2027.33 v2@314.89,2027.33
  Bottom Layer w15.75: v2@318.95,2023.27 R25.2@374.68,2023.27
WIFI_LED: R17.1 U4.38 | length 157.5
  Top Layer w10: U4.38@1385.74,2222.45 1385.74,2336.29 1413.14,2363.7 R17.1@1418.07,2363.7
pads on no net: J3.4 K1.4 K1.5 P1.3 P1.4 P1.5 P2.3 P2.4 P2.5 U4.4 U4.5 U4.7 U4.8 U4.9 U4.10 U4.11 U4.13 U4.14 U4.15 U4.16 U4.17 U4.18 U4.19 U4.20 U4.23 U4.26 U4.28 U4.29 U4.30 U4.31 U4.32 U4.33 U4.34 U4.35 U6.1 U6.2 U6.10 U6.12 U6.13 U6.14 U6.15 U6.16 U6.17 U6.18 U6.19 U6.20 U6.21 U6.22 U6.23 U6.27

## Polygon pours and split planes (outlines as drawn)
GND on Top Layer "GND_L01_P006" (solid, pour order 6): 255.65,3610.22 255.65,3375.89 35.82,3375.89 17.03,3357.1 24.83,3349.29 24.83,260.51 260.51,260.51 325.95,325.95 325.95,337.3 1064.06,337.3 1164.07,237.29 1164.07,209.67 2134.42,209.67 2915.76,991.01 2915.76,2699.94 2510.69,2699.94 2090.49,2699.94 2055.57,2694.49 2055.57,2935.32 1627.43,2935.32 1627.43,2715.14 1428.38,2715.14 1281.86,2861.66 1281.86,3608.08
GND on Bottom Layer "GND_L02_P005" (solid, pour order 5): 255.65,3375.89 255.65,3610.22 2601.77,3610.22 2601.77,1967.65 2724.19,1845.22 2724.19,901.36 2032.5,209.67 1164.07,209.67 1069.12,332.23 325.95,325.95 260.51,260.51 24.83,260.51 17.03,3357.1 35.82,3375.89 255.65,3375.89 35.82,3375.89

## Silkscreen, mask and mechanical layers (free items; w line width, h text height)
Top Overlay:
  drawing of 19 lines, arcs and shapes, not listed
  text "QC MODULE AC" at 1656.27,2934.65 h31.5 r90
  text "QC IN" at 2049.49,2929.07 h31.5 r270
  text "VBUS          CC        QC_GND" at 1693.03,2750.25 h31.5
  text "Version 1.0" at 3568.26,2703.51 h39.37 r90
  text "MICRO GRID 2024" at 3506.22,2637.6 h47.24 r90
  text "GND     RX     TX     5V" at 1616.07,2596.55 h31.5 r270
  text "PWR WIFI STATUS" at 12.13,2444.2 h39.37
  text "AC IN" at 3136.71,2111.86 h39.37 r90
  text "RESET" at 238.36,2069.42 h31.5
  text "POS      GND      NEG" at 3528.57,1976.3 h39.37 r90
  text "BOOT" at 260.79,1576.09 h31.5
  text "SOCKET OUT" at 3151.45,1371.4 h39.37 r90
  text "POS      GND      NEG" at 3552.67,1331.9 h39.37 r90
  text "GND      SENS     5V" at 1736.28,1178.72 h31.5
  text "+5V  GND" at 1393.84,458.87 h31.5 r270
  text "DC POWER SUPPLY" at 439.38,126.42 h31.5
  text "Made in USA" at 1240.62,37.21 h43.31
Bottom Overlay:
  lines w10: 5.35,4.38 246.57,4.38 246.57,246.02 5.35,246.02 5.35,4.38 ; 5.94,3375.67 247.16,3375.67 247.16,3617.32 5.94,3617.32 5.94,3375.67 ; 3383.43,3375.49 3624.66,3375.49 3624.66,3617.14 3383.43,3617.14 3383.43,3375.49 ; 3386.49,1.49 3627.71,1.49 3627.71,243.14 3386.49,243.14 3386.49,1.49
  text "Project by : -    Neil Klingensmith & Rushikesh R. Shirsat" at 72.53,595.42 h39.37 r270

## Text inside footprints (layer, text, board x,y; h text height)
J3: Bottom Designator "PCB Edge" at 37.49,1927.08 h31.5 r270
K1: Top 3D Body "*" at 2034.63,148.05 h31.5 r90; Top Overlay "*" at 1869.27,148.05 h31.5 r90
K2: Top 3D Body "*" at 2052.07,3140.06 h31.5 r90; Top Overlay "*" at 1886.71,3140.06 h31.5 r90